# Altium PCB PCB1.pcbdoc
Units mil, origin at the board's own origin, x right, y up, seen from the top; angles counter-clockwise.
Board outline 4425 x 4500 mil, 2 copper layers (Top Layer, Bottom Layer); 64 components, 61 nets, 284 pads, 245 vias.
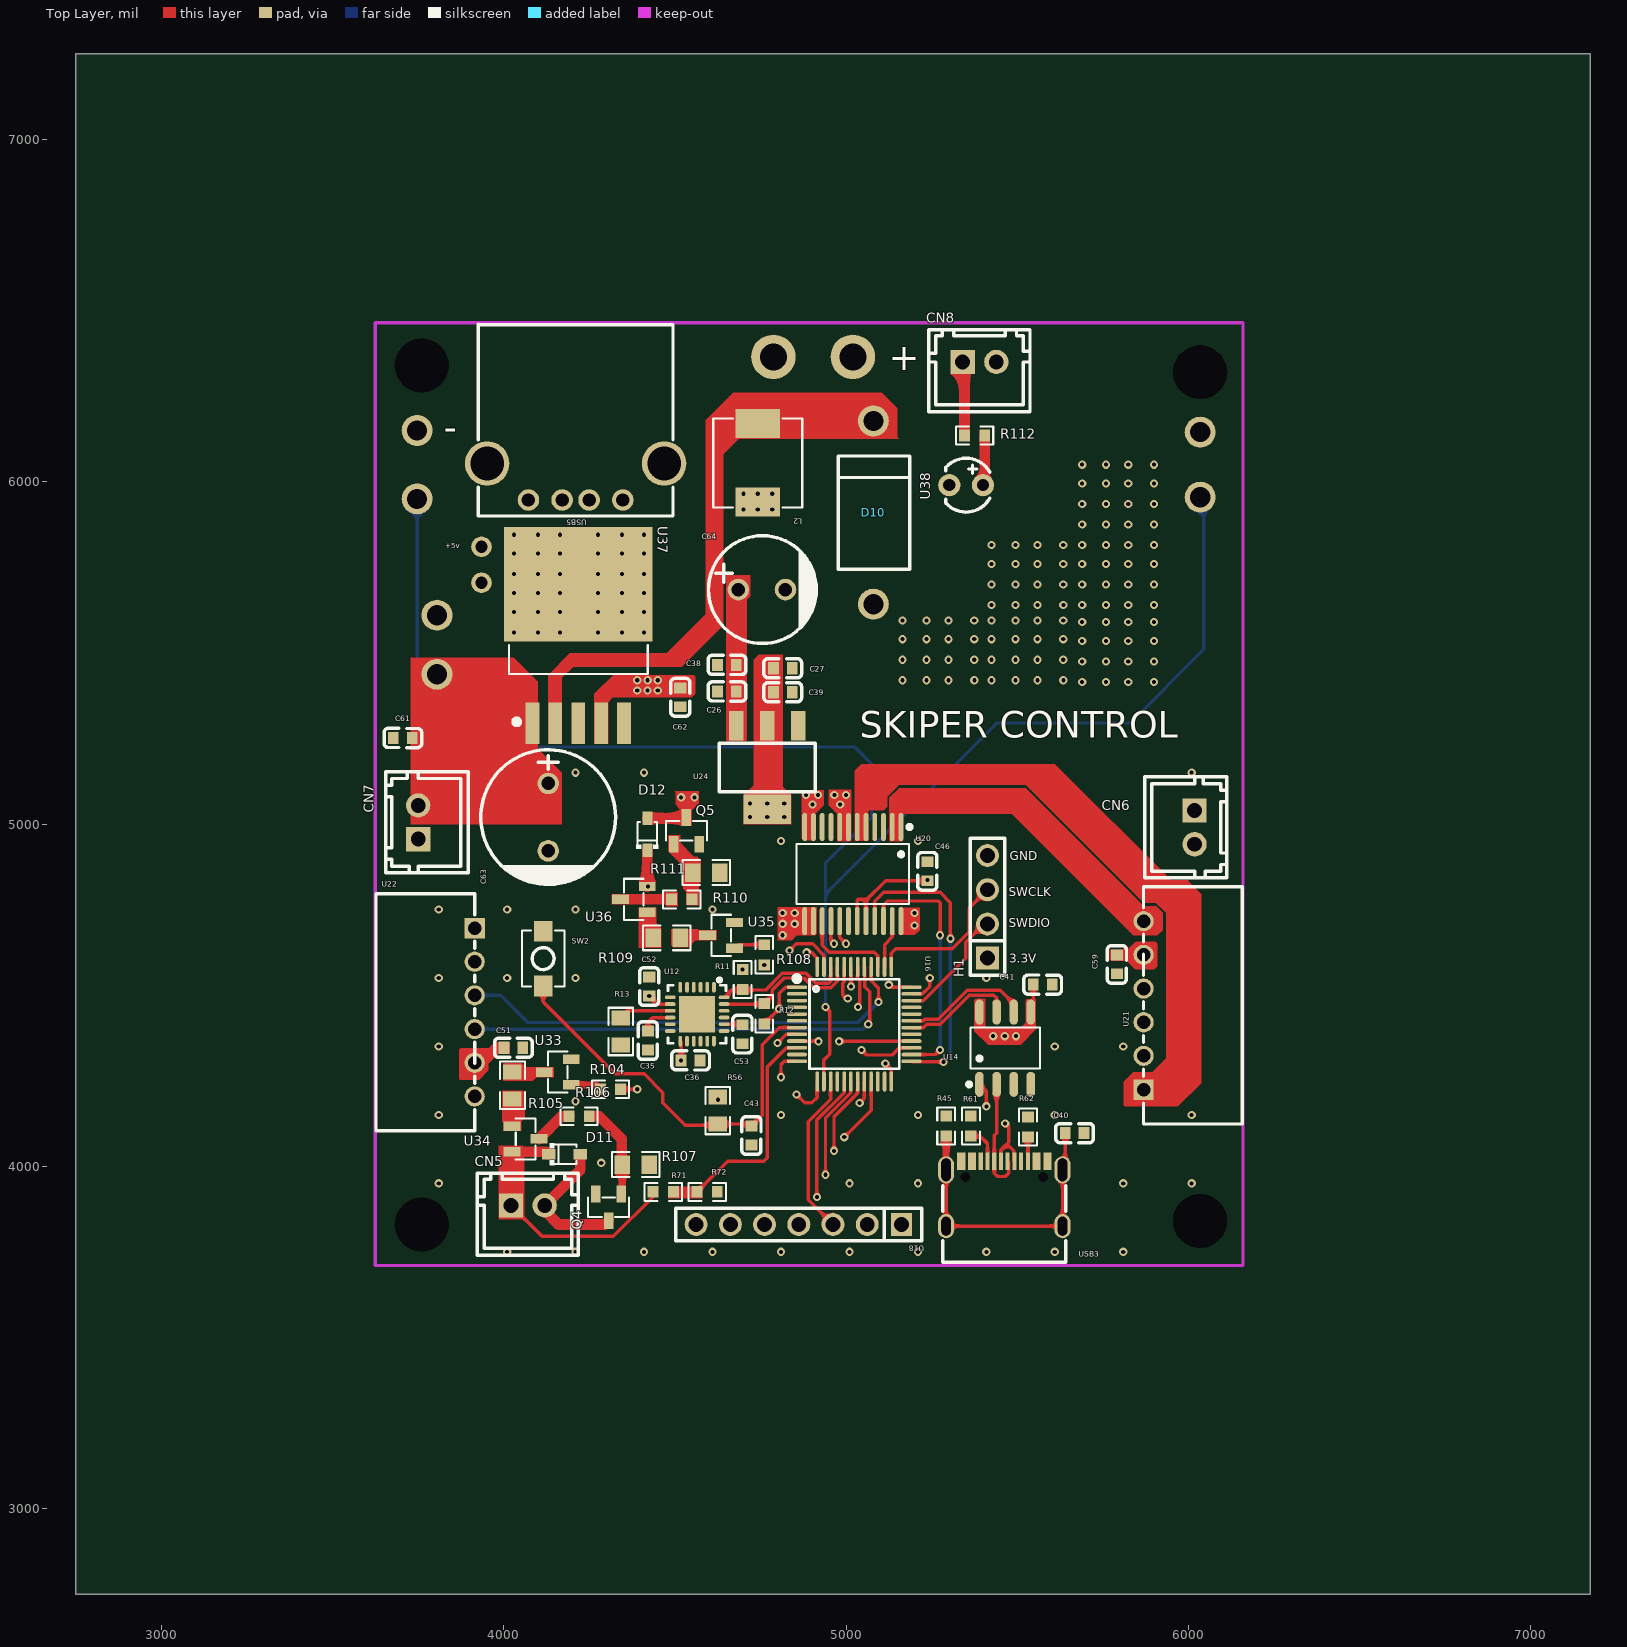
[diagram p0: Top Layer view]
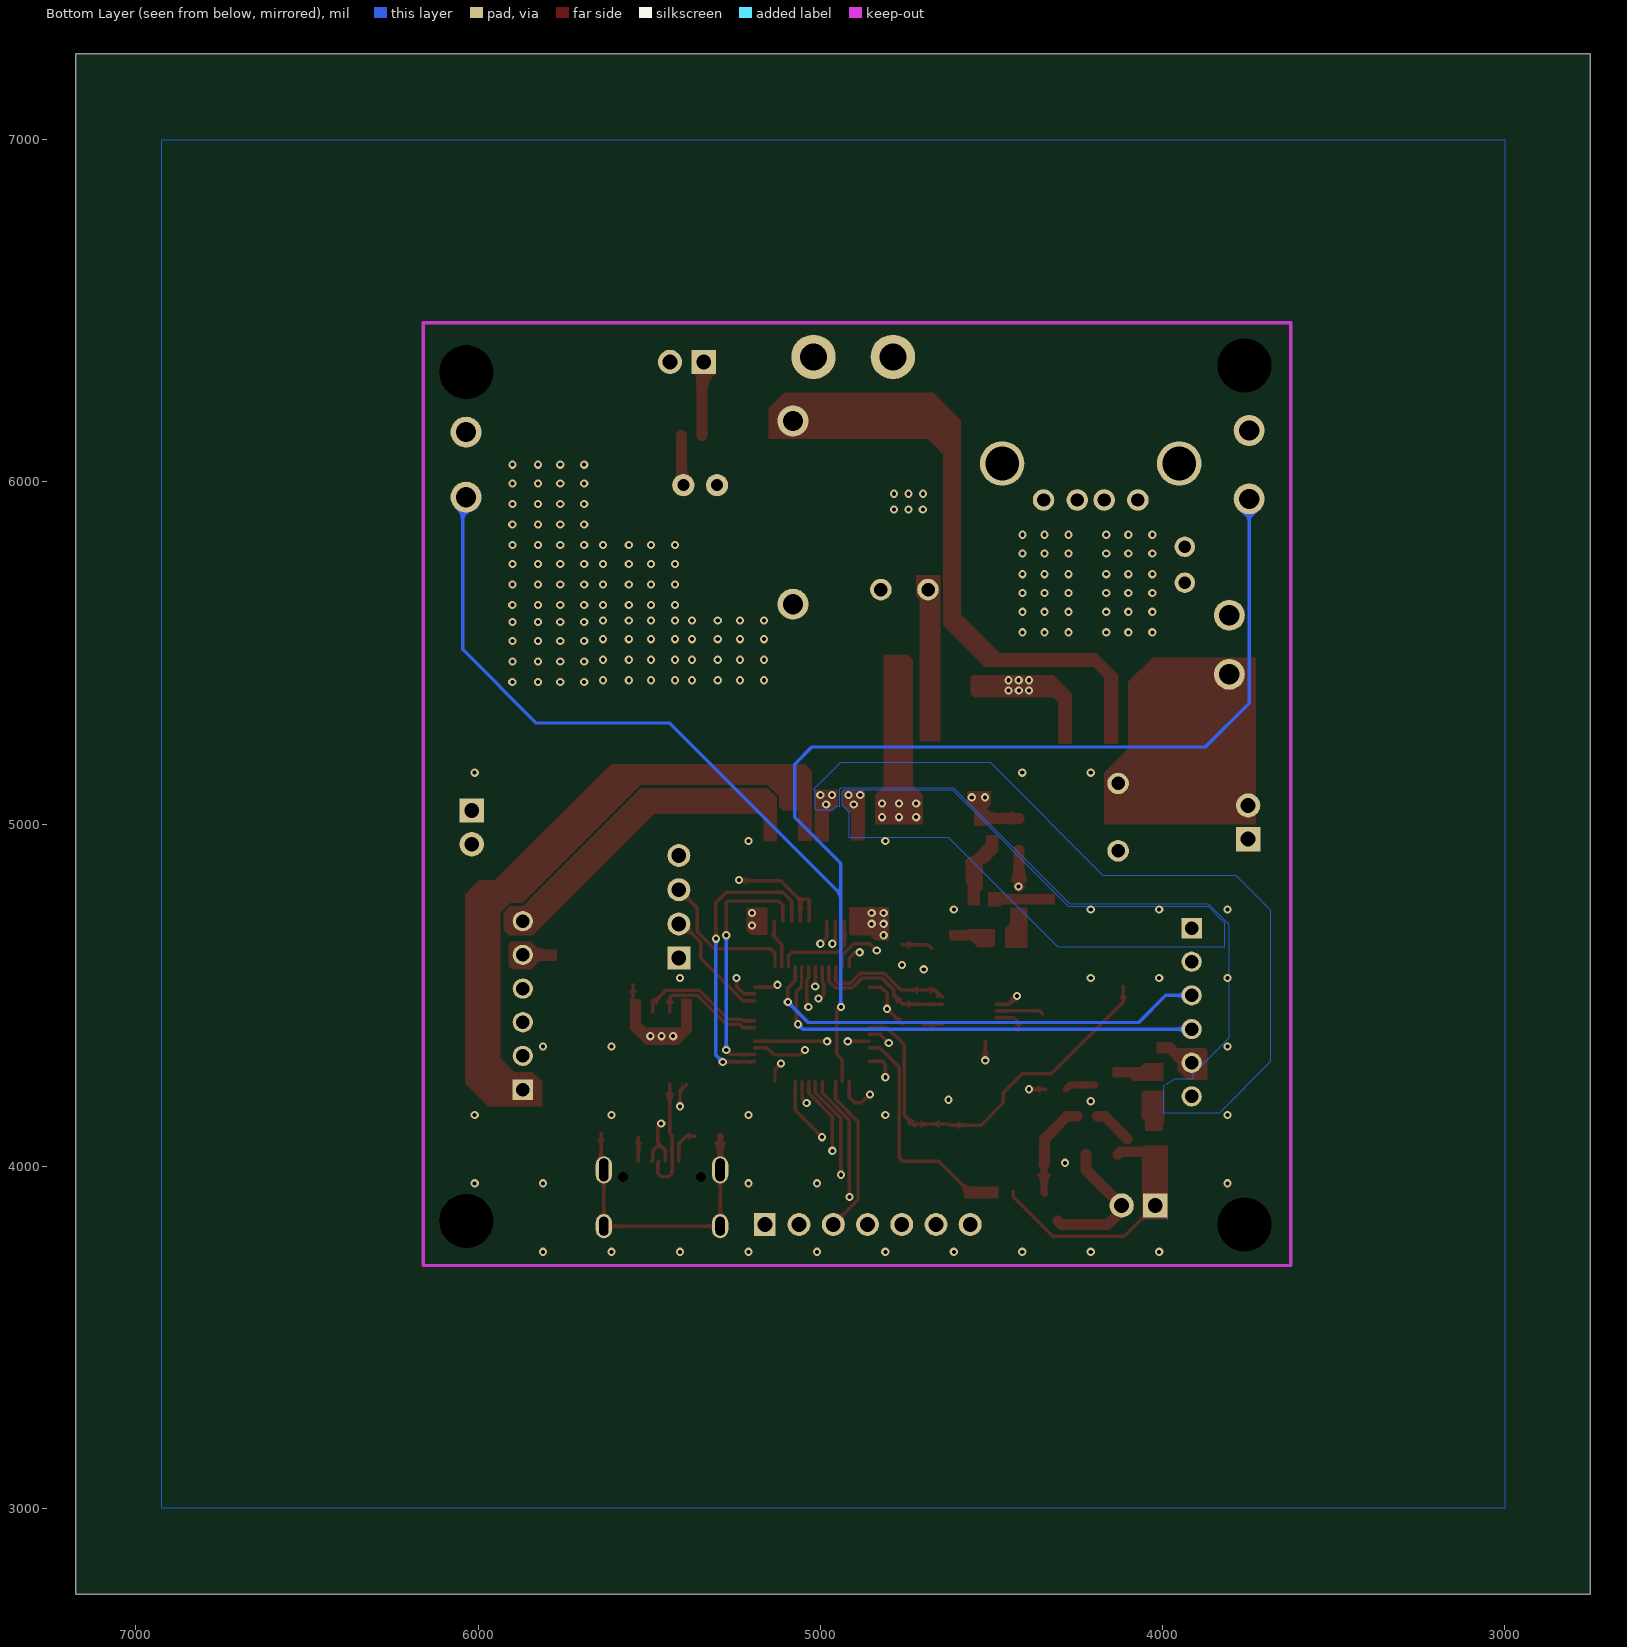
[diagram p1: Bottom Layer view, seen from below]

## Layer stack, top to bottom
Top Layer: signal copper (thickness not stored)
Dielectric: dielectric 12.6, FR-4, Dk 4.8
Bottom Layer: signal copper (thickness not stored)

## Board outline
7175,2750 2750,2750 2750,7250 7175,7250
cut-out: 6113.24,3840 ccw(c6034.5,3840) 5955.76,3840 ccw(c6034.5,3840)
cut-out: 3839.24,3830 ccw(c3760.5,3830) 3681.76,3830 ccw(c3760.5,3830)
cut-out: 3839.24,6340 ccw(c3760.5,6340) 3681.76,6340 ccw(c3760.5,6340)
cut-out: 6113.24,6320 ccw(c6034.5,6320) 5955.76,6320 ccw(c6034.5,6320)

## Components (designator, comment, footprint, x,y, rotation, side; value= is the part's Value field where it differs from the comment)
C26 "CL10A106KP8NNNC" C0603 4652.08,5387.32 r180 top
C27 "CL10A106KP8NNNC" C0603 4815.45,5455 r0 top
C35 "CC0603KRX7R9BB104" C0603 4420.93,4367.6 r90 top
C36 "CC0603KRX7R9BB104" C0603 4545.78,4309.43 r180 top
C38 "CC0603KRX7R9BB104" C0603 4652.08,5465 r180 top
C39 "CC0603KRX7R9BB104" C0603 4815.45,5385 r0 top
C40 "0603B104K500NT" C0603 5668.19,4096.61 r0 top
C41 "0603B104K500NT" C0603 5575,4530.62 r0 top
C43 "CC0603KRX7R9BB104" C0603 4723.78,4090 r90 top
C46 "0603B104K500NT" C0603 5237.72,4862.05 r90 top
C51 "0603B104K500NT" C0603 4027.95,4346.1 r180 top
C52 "CC0603KRX7R9BB103" C0603 4425,4525.13 r90 top
C53 "0603B222K500NT" C0603 4697.27,4385.59 r270 top
C59 "0603B104K500NT" C0603 5791.55,4590.07 r90 top
C61 "0603B104K500NT" C0603 3705,5251.41 r180 top
C62 "0603B104K500NT" C0603 4515.86,5370 r270 top
C63 "ERS1VM681G16OT" CAP-TH_BD10.0-P5.00-D0.6-FD 4130,5020 r270 top
C64 "01EC3470" CAP-TH_BD8.0-P3.50-D0.6-FD 4754.25,5685 r0 top
CN5 "ZX-XH2.54-2PZZ" CONN-TH_2P-P2.50_HX25003-2A 4070.44,3885.43 r0 top
CN6 "ZX-XH2.54-2PZZ" CONN-TH_2P-P2.50_HX25003-2A 6018.48,4990 r270 top
CN7 "ZX-XH2.54-2PZZ" CONN-TH_2P-P2.50_HX25003-2A 3750,5005 r90 top
CN8 "ZX-XH2.54-2PZZ" CONN-TH_2P-P2.50_HX25003-2A 5390,6350 r0 top
D10 "1N5824_C7503125" DO-27_BD5.3-L8.4-P12.40-D1.3-RD 5080,5910 r270 top
D11 "1N5819WS_C191023" SOD-323_L1.8-W1.3-LS2.5-RD 4177.37,4035 r0 top
D12 "1N5819WS_C191023" SOD-323_L1.8-W1.3-LS2.5-RD 4419.45,4970 r90 top
H1 "PZ254V-11-04P" HDR-TH_4P-P2.54-V-M 5413.47,4758.05 r90 top
L2 "SLO0630H220MTT" IND-SMD_L7.1-W6.6 4742.19,6055 r90 top
Q4 "2N7002_C916396" SOT-23-3_L2.9-W1.3-P1.90-LS2.4-BR 4306.31,3880 r90 top
Q5 "2N7002_C916396" SOT-23-3_L2.9-W1.3-P1.90-LS2.4-BR 4533.57,4980 r270 top
R11 "0603WAF4701T5E" R0603 4697.98,4545.73 r90 top
R12 "0603WAF4701T5E" R0603 4761,4445.82 r270 top
R13 "RT0805BRD0710KL" R0805 4341.53,4393.71 r90 top
R45 "0603WAF4701T5E" R0603 5292.6,4117.62 r270 top
R56 "RT0805BRD0710KL" R0805 4625.54,4162.81 r90 top
R61 "0603WAF4701T5E" R0603 5365,4117.62 r270 top
R62 "0603WAF4701T5E" R0603 5531.58,4114.66 r90 top
R71 "0603WAF4701T5E" R0603 4465.9,3925 r180 top
R72 "0603WAF1001T5E" R0603 4594.24,3925 r180 top
R104 "0603WAF1001T5E" R0603 4311.87,4224.98 r0 top
R105 "RT0805BRD0710KL" R0805 4025.39,4236.07 r270 top
R106 "0603WAF1001T5E" R0603 4220,4146.14 r180 top
R107 "RT0805BRD0710KL" R0805 4385.63,4004.98 r180 top
R108 "0603WAF1001T5E" R0603 4761,4617.72 r270 top
R109 "RT0805BRD0710KL" R0805 4476.36,4667.26 r180 top
R110 "0603WAF1001T5E" R0603 4520.18,4779.68 r180 top
R111 "RT0805BRD0710KL" R0805 4591.38,4858.06 r180 top
R112 "0603WAF1001T5E" R0603 5375.68,6135.31 r180 top
SW2 "TS342A2P-WZ" SW-SMD_L4.0-W2.9-LS5.0 4115,4606.68 r90 top
U12 "MPU-6050" QFN-24_L4.0-W4.0-P0.50-BL-EP2.7 4565.07,4444.25 r180 top
U14 "CH340N" SOP-8_L4.9-W3.9-P1.27-LS6.0-BL 5465,4345 r0 top
U16 "STM32F103C8T6" LQFP-48_L7.0-W7.0-P0.50-LS9.0-BL 5024.11,4415 r270 top
U18 "PM254-1-07-Z-8.5" HDR-TH_7P-P2.54-V-F 4862.1,3830 r180 top
U20 "TB6612FNG(O,C,8,EL" SSOP-24_L8.4-W5.8-P0.65-LS7.8-BL 5020,4853.67 r180 top
U21 "ZX-XH2.54-6PWZ" CONN-TH_6P-P2.50_ZX-XH2.54-6PWZ 5869.36,4470 r90 top
U22 "ZX-XH2.54-6PWZ" CONN-TH_6P-P2.50_ZX-XH2.54-6PWZ 3915,4450 r270 top
U24 "AMS1117-5.0_C347223" SOT-223_L6.7-W3.5-P2.30-BR 4770,5165.09 r90 top
U33 "SS8050_C7420370" SOT-23-3_L2.9-W1.3-P1.90-LS2.4-BR 4157.73,4275 r0 top
U34 "SS8550_C7420371" SOT-23-3_L2.9-W1.3-P1.90-LS2.4-BR 4063.58,4080 r180 top
U35 "SS8050_C7420370" SOT-23-3_L2.9-W1.3-P1.90-LS2.4-BR 4635.06,4674.77 r0 top
U36 "SS8550_C7420371" SOT-23-3_L2.9-W1.3-P1.90-LS2.4-BR 4380,4780 r0 top
U37 "LM2596S-5.0_C347421" TO-263-5_L10.2-W8.9-P1.70-BR 4217.75,5497.53 r270 top
U38 "204-10SDRD/S530-A3/F182-68" LED-TH_BD4.0-P2.50-RD 5351.03,5990 r0 top
USB3 "KH-TYPE-C-16P" USB-C-SMD_KH-TYPE-C-16P 5462.68,3920 r0 top
USB5 "USB-231-BRW" USB-A-TH_USB-231-ARY 4210,6000 r180 top

## Footprints (in the part's own frame and the unit in brackets; to place one, negate y for a bottom-side part, rotate by r counter-clockwise, add the part's x,y. Pads: shape width x height; smd on the part's side, far side on the other; paste and mask are expansions set on the pad)
C0603 [mm]
  rect 0.8x0.9 smd: 1(-0.7,0) 2(0.7,0)
  silkscreen extent -1.41,-0.71 1.39,0.72
CAP-TH_BD8.0-P3.50-D0.6-FD [mm]
  round 1.6 hole 1: 1(-1.75,0) 2(1.75,0)
  silkscreen extent -3.96,-4 4.04,4
CAP-TH_BD10.0-P5.00-D0.6-FD [mm]
  round 1.6 hole 1: 1(-2.5,0) 2(2.5,0)
  silkscreen extent -5,-5 5.08,5
CONN-TH_2P-P2.50_HX25003-2A [mm]
  rect 1.8x1.8 hole 1.1: 1(-1.25,0)
  round 1.8 hole 1.1: 2(1.25,0)
  silkscreen extent -3.75,-3.7 3.75,2.41
CONN-TH_6P-P2.50_ZX-XH2.54-6PWZ [mm]
  rect 1.524x1.5 hole 1: 1(-6.25,0)
  round 1.5 hole 1: 2(-3.75,0) 3(-1.25,0) 4(1.25,0) 5(3.75,0) 6(6.25,0)
  silkscreen extent -8.8,-7.32 8.8,0
DO-27_BD5.3-L8.4-P12.40-D1.3-RD [mm]
  round 2.3 hole 1.5: 1(-6.8,0) 2(6.8,0)
  silkscreen extent -4.2,-2.6 4.2,2.7
HDR-TH_4P-P2.54-V-M [mm]
  rect 1.7x1.7 hole 1.1: 1(-3.81,0)
  round 1.7 hole 1.1: 2(-1.27,0) 3(1.27,0) 4(3.81,0)
  silkscreen extent -5.08,-1.27 5.08,1.27
HDR-TH_7P-P2.54-V-F [mm]
  rect 1.575x1.7 hole 1.1: 1(-7.62,0)
  round 1.7 hole 1.1: 2(-5.08,0) 3(-2.54,0) 4(0,0) 5(2.54,0) 6(5.08,0) 7(7.62,0)
  silkscreen extent -9.13,-1.2 9.13,1.2
IND-SMD_L7.1-W6.6 [mm]
  rect 2.15x3.32 smd: 1(-2.913,0) 2(2.913,0)
  silkscreen extent -3.3,-3.3 3.3,3.3
LED-TH_BD4.0-P2.50-RD [mil]
  round 65 hole 35.43: 1(-49.21,0) 2(49.2,0)
  silkscreen extent -59,-79 69,79
LQFP-48_L7.0-W7.0-P0.50-LS9.0-BL [mm]
  oval 0.27x1.5 smd: 1(-2.75,-4.25) 2(-2.25,-4.25) 3(-1.75,-4.25) 4(-1.25,-4.25) 5(-0.75,-4.25) 6(-0.25,-4.25) 7(0.25,-4.25) 8(0.75,-4.25) 9(1.25,-4.25) 10(1.75,-4.25) 11(2.25,-4.25) 12(2.75,-4.25) 25(2.75,4.25) 26(2.25,4.25) 27(1.75,4.25) 28(1.25,4.25) 29(0.75,4.25) 30(0.25,4.25) 31(-0.25,4.25) 32(-0.75,4.25) 33(-1.25,4.25) 34(-1.75,4.25) 35(-2.25,4.25) 36(-2.75,4.25)
  oval 1.5x0.27 smd: 13(4.25,-2.75) 14(4.25,-2.25) 15(4.25,-1.75) 16(4.25,-1.25) 17(4.25,-0.75) 18(4.25,-0.25) 19(4.25,0.25) 20(4.25,0.75) 21(4.25,1.25) 22(4.25,1.75) 23(4.25,2.25) 24(4.25,2.75) 37(-4.25,2.75) 38(-4.25,2.25) 39(-4.25,1.75) 40(-4.25,1.25) 41(-4.25,0.75) 42(-4.25,0.25) 43(-4.25,-0.25) 44(-4.25,-0.75) 45(-4.25,-1.25) 46(-4.25,-1.75) 47(-4.25,-2.25) 48(-4.25,-2.75)
  silkscreen extent -3.59,-4.46 3.3,3.34
QFN-24_L4.0-W4.0-P0.50-BL-EP2.7 [mm]
  oval 0.28x0.8 smd: 1(-1.25,-2) 2(-0.75,-2) 3(-0.25,-2) 4(0.25,-2) 5(0.75,-2) 6(1.25,-2) 13(1.25,2) 14(0.75,2) 15(0.25,2) 16(-0.25,2) 17(-0.75,2) 18(-1.242,2)
  oval 0.8x0.28 smd: 7(2,-1.25) 8(2,-0.75) 9(2,-0.25) 10(2,0.25) 11(2,0.75) 12(2,1.25) 19(-2,1.25) 20(-2,0.75) 21(-2,0.25) 22(-2,-0.25) 23(-2,-0.75) 24(-2,-1.25)
  rect 2.7x2.7 smd: 25(0.012,0)
  silkscreen extent -2.14,-2.79 2.16,2.15
R0603 [mil]
  rect 31.75x34.02 smd: 1(-29.66,0) 2(29.66,0)
  silkscreen extent -55,-26 55,26
R0805 [mm]
  rect 1.133x1.377 smd: 1(-1,0) 2(1,0)
  silkscreen extent -1.76,-0.92 1.76,0.92
SOD-323_L1.8-W1.3-LS2.5-RD [mm]
  rect 1x0.75 smd: 1(-1.173,0) 2(1.173,0)
  silkscreen extent -1.08,-0.8 0.9,0.8
SOP-8_L4.9-W3.9-P1.27-LS6.0-BL [mm]
  oval 0.63x1.865 smd: 1(-1.905,-2.682) 2(-0.635,-2.682) 3(0.635,-2.682) 4(1.905,-2.682) 5(1.905,2.682) 6(0.635,2.682) 7(-0.635,2.682) 8(-1.905,2.682)
  silkscreen extent -2.82,-2.83 2.58,1.52
SOT-23-3_L2.9-W1.3-P1.90-LS2.4-BR [mm]
  rect 1.25x0.7 smd: 1(1,-0.95) 2(1,0.95) 3(-1,0)
  silkscreen extent -0.73,-1.53 0.73,1.53
SOT-223_L6.7-W3.5-P2.30-BR [mm]
  rect 2.2x1.1 smd: 1(3.099,-2.3) 2(3.099,0) 3(3.099,2.3)
  rect 2.2x3.5 smd: 4(-3.099,0)
  silkscreen extent -1.8,-3.55 1.8,3.55
SSOP-24_L8.4-W5.8-P0.65-LS7.8-BL [mil]
  oval 14.33x81.97 smd: 1(-140.75,-137.44) 2(-115.16,-137.44) 3(-89.57,-137.44) 4(-63.98,-137.44) 5(-38.39,-137.44) 6(-12.79,-137.44) 7(12.8,-137.44) 8(38.39,-137.44) 9(63.98,-137.44) 10(89.57,-137.44) 11(115.16,-137.44) 12(140.75,-137.44) 13(140.75,137.44) 14(115.16,137.44) 15(89.57,137.44) 16(63.98,137.44) 17(38.39,137.44) 18(12.8,137.44) 19(-12.79,137.44) 20(-38.39,137.44) 21(-63.98,137.44) 22(-89.57,137.44) 23(-115.16,137.44) 24(-140.75,137.44)
  silkscreen extent -172,-143 164,87
SW-SMD_L4.0-W2.9-LS5.0 [mm]
  rect 1.53x1.36 smd: 1(-2.035,0) 2(2.035,0)
  silkscreen extent -2.08,-1.58 2.08,1.58
TO-263-5_L10.2-W8.9-P1.70-BR [mm]
  rect 3.083x1.02 smd: 1(5.16,-3.4) 2(5.16,-1.7) 3(5.16,0) 4(5.16,1.7) 5(5.16,3.4)
  rect 8.5x11 smd: 6(-5.16,0)
  silkscreen extent -0.66,-5.16 5.26,5.16
USB-A-TH_USB-231-ARY [mm]
  round 1.6 hole 1: 1(-3.5,1.355) 2(-1,1.355) 3(1,1.355) 4(3.5,1.355)
  round 3.3 hole 2.5: 5(-6.57,-1.355) 6(6.57,-1.355)
  silkscreen extent -7.23,-11.68 7.24,2.54
USB-C-SMD_KH-TYPE-C-16P [mm]
  oval 1.2x2 hole 0.7 slot 1.7 at 90 deg: 1(-4.32,1.765) 2(4.32,1.765)
  oval 1.2x1.8 hole 0.7 slot 1.4 at 90 deg: 3(-4.32,-2.415) 4(4.32,-2.415)
  rect 0.3x1.3 smd: A1(-3.35,2.415) A4(-2.55,2.415) A5(-1.25,2.415) A6(-0.25,2.415) A7(0.25,2.415) A8(1.25,2.415) A9(2.55,2.415) A12(3.35,2.415) B1(3.05,2.415) B4(2.25,2.415) B5(1.75,2.415) B6(0.75,2.415) B7(-0.75,2.415) B8(-1.75,2.415) B9(-2.25,2.415) B12(-3.05,2.415)
  Multi-Layer board cut-out: -2.54,1.235 -2.575,1.387 -2.672,1.509 -2.812,1.576 -2.968,1.576 -3.108,1.509 -3.205,1.387 -3.24,1.235 -3.24,1.235 -3.205,1.083 -3.108,0.961 -2.968,0.894 -2.812,0.894 -2.672,0.961 -2.575,1.083 -2.54,1.235
  Multi-Layer board cut-out: 3.24,1.235 3.205,1.387 3.108,1.509 2.968,1.576 2.812,1.576 2.672,1.509 2.575,1.387 2.54,1.235 2.54,1.235 2.575,1.083 2.672,0.961 2.812,0.894 2.968,0.894 3.108,0.961 3.205,1.083 3.24,1.235
  silkscreen extent -4.57,-5.08 4.57,0.57

## Free pads (board coordinates)
  round 60 hole 36: 1(3935,5810) 2(3935,5705)
  round 90.55 hole 59.06: 7(6035,5955) 8(6035,6145) 9(3746.93,5950) 9(3805,5437.44) 9(3805,5610) 10(3746.93,6150)
  round 129.92 hole 78.74: 9(4787.89,6365) 9(5020,6365)

## Via types
v1: diameter 24.02, hole 12.01, Top Layer to Bottom Layer, 208 vias
v2: diameter 24.02, hole 11.97, Top Layer to Bottom Layer, 37 vias

## Nets (pads, with @x,y where several pads share a name; then routed paths per layer and width w, separated by ;. In a path a pad name is that pad's centre, name@x,y a point inside that pad or via, vN(x,y) a via of type N, cw(c..) or ccw(c..) an arc to the next point about the centre after c; other vN are vias at no path point)
3.3V: C27.1 C36.2 C39.1 C41.1 C46.1 C51.2 C52.1 C59.2 H1.1 R11.2 R12.2 R56.2 U12.8 U12.13 U14.5 U14.8 U16.1 U16.9 U16.24 U16.36 U16.48 U18.2 U20.19 U20.20 U21.5 U22.5 U24.2 U24.4 | length 994.1
  Top Layer w10: v1(4425,4497.57) 4448.79,4473.78 U12.8 ; U12.13 4518.22,4363.15 v1(4518.22,4309.43) ; R12.2 4804.84,4460 v1(4805,4460) 4805,4505 4823.27,4523.27 U16.1 ; U16.9 4919.21,4365.79 v1(4920,4365) ; v1(4885,4625) 4899.14,4625 4915.84,4608.3 U16.48 ; U20.19 5032.79,4777.79 5035,4780 5055,4780 5058.39,4776.61 ; U20.20 5058.39,4776.61 ; v1(5115,4300) 5132.38,4282.62 U16.24 ; v1(5125,4530) 5131.73,4523.27 U16.36 ; C46.1 5116.27,4834.49 5058.39,4776.61 ; U14.5 5547.44,4458.05 C41.1
  Bottom Layer w10: v1@4880,4620 v1(4885,4625)
  other v1: 4625.54,4194.31 5430,4380 5463.7,4380 5496.77,4380 4697.98,4575.39 5237.72,4836.46 4720,5020 4770,5020 4819.61,5020 4720,5060 4770,5060 4819.61,5060
$1N2316: C35.2 U12.10 | length 96.6
  Top Layer w10: C35.2 4420.93,4420.71 4434.63,4434.41 U12.10
$1N2321: C53.1 U12.20 | length 54.1
  Top Layer w10: U12.20 4695.7,4414.72 C53.1
$1N2324: R13.2 U12.9 | length 139.9
  Top Layer w10: R13.2@4350.27,4444.84 4359.52,4454.09 U12.9
$1N3664: C40.1 R45.2 USB3.1 USB3.2 USB3.3 USB3.4 | length 878.1
  Top Layer w10: USB3.1 USB3.3 USB3.4 USB3.2 5640.63,3997.36 C40.1
  Top Layer w20: USB3.1 R45.2
$1N3668: R61.2 USB3.A5 | length 108.8
  Top Layer w10: R61.2 5392.04,4087.96 5413.47,4066.53 USB3.A5
$1N3669: R62.1 USB3.B5 | length 69.9
  Top Layer w10: USB3.B5 R62.1
$1N37891: R104.1 U33.1 | length 90.3
  Top Layer w19.68: U33.1 4269.58,4237.6 R104.1
$1N37935: R105.1 U33.3
$1N37939: R105.2 U34.1
$1N37979: R106.2 U34.3 | length 114.8
  Top Layer w31.5: U34.3 4169.09,4146.14 R106.2
$1N38083: Q4.1 R106.1 R107.2 | length 284.9
  Top Layer w19.68: Q4.1 4346.26,3921.92 R107.2
  Top Layer w31.5: R106.1 4278.86,4146.14 4345,4080 4345,4006.24 R107.2
$1N38443: R108.1 U35.1 | length 90.7
  Top Layer w10: U35.1 4684.44,4647.38 R108.1
$1N38448: R109.1 U35.3
$1N38450: R109.2 U36.1
$1N38452: R110.2 U36.3
$1N38463: Q5.1 R110.1 R111.2
$1N51871: D10.1 L2.2 U37.2
$1N54096: R112.1 U38.2 | length 147.4
  Top Layer w31.5: U38.2 5405.34,5995.1 R112.1
$1N58015: CN5.2 D11.2 Q4.3 | length 415.5
  Top Layer w31.5: D11.2 4223.54,3989.32 CN5.2 4119.65,3870.35 4160,3830 4295.68,3830 Q4.3
$1N58022: CN6.2 CN7.1 D12.2 Q5.3 | length 115.4
  Top Layer w31.5: D12.2 4530.36,5016.16 Q5.3
  other v1: 4518.46,5077.94 4557.7,5077.94
+5V: C26.1 C38.1 C62.1 C64.1 L2.1 pad.1 U24.3 U37.4 USB5.1
  other v1: 4390,5390 4420,5390 4450,5390 4390,5420.18 4420.49,5420.18 4449.9,5420.18 4700.5,5918.64 4742.19,5918.64 4784.55,5918.64 4700,5965 4742.19,5965 4784.55,5965
A_M1: U20.5 U20.6 U21.1
A_M2: U20.1 U20.2 U21.6
ADC1: R71.1 R72.2 U16.10 | length 621.9
  Top Layer w10: R72.2 4654.58,4015 4760,4015 4770,4025 4770,4290 4826.1,4346.1 U16.10
AIN1: U16.25 U20.21 | length 869.5
  Top Layer w10: U20.21 5083.98,4773.98 5110,4800 5275,4800 5305,4770 v1(5305,4665) ; U16.25 5193.16,4305 v1(5285,4305)
  Bottom Layer w10: v1(5285,4305) 5305,4325 v1(5305,4665)
AIN2: U16.26 U20.22 | length 738
  Top Layer w10: U20.22 5109.57,4762.22 5122.35,4775 5270,4775 5275,4770 v1(5275,4675) ; U16.26 5261.42,4326.42 v1(5275,4340)
  Bottom Layer w10: v1(5275,4340) v1(5275,4675)
B_M1: U20.11 U20.12 U22.1
  other v1: 4902.5,5057.26 4883.21,5085 4918.04,5085
B_M2: U20.7 U20.8 U22.6
  other v1: 4982.92,5057.26 4965.95,5085 4999.93,5085
BIN1: U16.27 U20.17 | length 580.4
  Top Layer w10: U20.17 4981.61,4668.39 v1(5000,4650) ; v1(5045,4340) 5060,4325 5135,4325 5156.1,4346.1 U16.27
  Inner1 w10: v1(5000,4650) 4980,4630 4980,4425 5010,4395 5010,4375 v1(5045,4340)
BIN2: U16.28 U20.16 | length 572.9
  Top Layer w10: U20.16 4956.02,4658.98 v1(4965,4650) ; v1(4980,4365) 5156.12,4365 5156.91,4365.79 U16.28
  Inner1 w10: v1(4965,4650) 4965,4380 v1(4980,4365)
D+: U14.1 USB3.A6 USB3.B6 | length 334.9
  Top Layer w10: U14.1 5410,4219.39 v1(5410,4175) ; USB3.A6 5452.84,4047.84 5462.93,4057.93 ; v1(5465,4125) 5475,4115 5475,4070 5462.93,4057.93 ; USB3.B6 5490,4017.29 5490,4045 5477.07,4057.93 5462.93,4057.93
  Inner1 w10: v1(5410,4175) 5460,4125 v1(5465,4125)
D-: U14.2 USB3.A7 USB3.B7 | length 348.7
  Top Layer w10: U14.2 5440,4096.88 5433.15,4090.02 USB3.B7 5433.15,3980 5443.15,3970 5465,3970 5475.3,3980.3 5475.3,4012.3 USB3.A7
ENCODER1_A: U16.42 U21.3 | length 974.6
  Top Layer w10: U16.42 5033.95,4551.05 5040,4545 5040,4470 v1(5035,4465)
  Inner1 w10: v1(5035,4465) 5055,4445 5845.14,4445 U21.3
ENCODER1_B: U16.43 U21.4 | length 927.8
  Top Layer w10: U16.43 5014.27,4550.96 5015,4550.23 v1(5015,4525)
  Inner1 w10: v1(5015,4525) 5036.99,4503.01 5853.15,4503.01 U21.4
ENCODER2_A: U16.40 U22.3 | length 1349
  Top Layer w10: U16.40 5073.32,4542.01 5095,4520.33 v1(5095,4480)
  Bottom Layer w10: U22.3 3990.78,4499.22 4070,4420 5035,4420 v1(5095,4480)
ENCODER2_B: U16.41 U22.4 | length 1332.1
  Top Layer w10: U16.41 5055,4580.96 5055,4525 5070,4510 5070,4420 v1(5065,4415)
  Bottom Layer w10: U22.4 5050.79,4400.79 v1(5065,4415)
GND: C26.2 C27.2 C35.1 C36.1 C38.2 C39.2 C40.2 C41.2 C43.1 C46.2 C51.1 C52.2 C53.2 C59.1 C61.2 C62.2 C63.2 C64.2 CN8.2 D10.2 H1.4 pad.2 pad.8 pad.9@4787.89,6365 pad.10 Q4.2 Q5.2 R13.1 R45.1 R61.1 R62.2 R72.1 R107.1 R111.1 SW2.2 U12.18 U14.3 U16.8 U16.20 U16.23 U16.35 U16.44 U16.47 U18.1 U20.3 U20.4 U20.9 U20.10 U20.18 U21.2 U22.2 U24.1 U33.2 U35.2 U37.3 U37.5 U37.6 U38.1 USB3.A1 USB3.A12 USB3.B1 USB3.B12 USB5.4 USB5.5 USB5.6 | length 488.6
  Top Layer w10: v1(4800,4360) 4825.47,4385.47 U16.8 ; v1(4835,4630) 4855,4650 4902.38,4650 4935.53,4616.85 U16.47 ; U16.44 4994.58,4539.58 4990,4535 4990,4500 5000,4490 v1(5005,4490) ; v1(5040,4185) 5053.64,4198.64 U16.20 ; U16.35 5223.58,4503.58 5245,4525 v1(5245,4550)
  Bottom Layer w10: v1@4835,4625 v1(4835,4630)
  other v1: 4285,4010 5690,5415 5760,5415 5824.59,5415 5900,5415 5165,5420 5235,5420 5299.59,5420 5375,5420 5425,5420 5495,5420 5559.59,5420 5635,5420 5690,5475 5760,5475 5824.59,5475 5899.7,5475 5165,5480 5235,5480 5299.59,5480 5374.7,5480 5425,5480 5495,5480 5559.59,5480 5634.7,5480 5690,5535 5760,5535 5824.59,5535 5899.7,5535 5165,5540 5235,5540 5299.59,5540 5374.7,5540 5425,5540 5495,5540 5559.59,5540 5634.7,5540 4030,5560 4100,5560 4164.59,5560 4275,5560 4345,5560 4409.59,5560 5690,5590 5760,5590 5824.59,5590 5899.7,5590 5165,5595 5235,5595 5299.59,5595 5374.7,5595 5425,5595 5495,5595 5559.59,5595 5634.7,5595 4030,5620 4100,5620 4164.59,5620 4275,5620 4345,5620 4409.59,5620 5425,5640 5495,5640 5559.59,5640 5635,5640 5690,5640 5760,5640 5824.59,5640 5900,5640 4030,5675 4100,5675 4164.59,5675 4275,5675 4345,5675 4409.59,5675 5425,5700 5495,5700 5559.59,5700 5634.7,5700 5690,5700 5760,5700 5824.59,5700 5899.7,5700 4030,5730 4100,5730 4164.59,5730 4275,5730 4345,5730 4409.59,5730 5425,5760 5495,5760 5559.59,5760 5634.7,5760 5690,5760 5760,5760 5824.59,5760 5899.7,5760 4030,5790 4100,5790 4164.59,5790 4275,5790 4345,5790 4409.59,5790 5425,5815 5495,5815 5559.59,5815 5634.7,5815 5690,5815 5760,5815 5824.59,5815 5899.7,5815 4030,5845 4100,5845 4164.59,5845 4275,5845 4345,5845 4409.59,5845 5690,5875 5760,5875 5824.59,5875 5900,5875 5690,5935 5760,5935 5824.59,5935 5899.7,5935 5690,5995 5760,5995 5824.59,5995 5899.7,5995 5690,6050 5760,6050 5824.59,6050 5899.7,6050
  other v2: 4010,3750 4210,3750 4410,3750 4610,3750 4810,3750 5010,3750 5210,3750 5410,3750 5610,3750 5810,3750 3810,3950 5010,3950 5210,3950 5810,3950 6010,3950 3810,4150 4810,4150 5210,4150 5610,4150 6010,4150 4210,4190 3810,4350 5610,4350 5810,4350 3810,4550 4010,4550 4210,4550 5410,4550 3810,4750 4010,4750 4210,4750 4610,4750 4810,4950 5210,4950 4210,5150 4410,5150 6010,5150
GROUND: pad.7 pad.9@3746.93,5950 U16.14 | length 4844.3
  Top Layer w10: U16.14 4935.53,4310.53 4952.23,4327.23 4952.23,4452.77 v1(4940,4465)
  Bottom Layer w10: pad.9@3746.93,5950 3746.93,5353.07 3875,5225 5025,5225 5075,5175 5075,5020 4940,4885 4940,4795 ; v1(4940,4465) 4940,4795 ; pad.7 6045,5945 6045,5510 5830,5295 5440,5295 4940,4795
I2C1_SCL: R12.1 U12.23 U16.45 | length 434.1
  Top Layer w10: U12.23 4759.3,4473.78 R12.1 4785,4499.48 4785,4515 4820,4550 4877.35,4550 4906.36,4520.98 4955.98,4520.98 4975,4540 4975,4582.22 U16.45
I2C1_SDA: R11.1 U12.24 U16.46 | length 397
  Top Layer w10: U12.24 4665.35,4515 4765,4515 4814.02,4564.02 4883.15,4564.02 4912.17,4535 4950.18,4535 4955.21,4540.03 U16.46
OSC_IN: U16.5
OSC_OUT: U16.6
POWER: U16.32
PWMA: U16.38 U20.23 | length 143.2
  Top Layer w10: U16.38 5112.69,4647.69 5135,4670 5135,4716.07 U20.23
PWMB: U16.39 U20.15 | length 279.2
  Top Layer w10: U20.15 4930,4715.8 4930,4645.58 4950.58,4625 5083.01,4625 5093.01,4615 U16.39
RST: C43.2 R56.1 SW2.1 U16.7 | length 1198.6
  Top Layer w10: SW2.1 4115,4480 4325,4270 4410,4270 4465,4215 4465,4185.36 4530.36,4120 4622.1,4120 R56.1 4717.9,4123.44 C43.2 4755,4148.78 4755,4355 4805.16,4405.16 U16.7
SAO: R108.2 U16.13 | length 541.6
  Top Layer w10: v1(4855,4210) 4880,4185 4900,4185 4915.84,4200.84 U16.13
  Inner1 w10: v1(4761,4588.06) 4855,4494.06 v1(4855,4210)
SPI1_CS: U16.21 U18.7 | length 733.6
  Top Layer w10: v1(4995,4085) 5073.32,4163.32 U16.21
  Inner1 w10: U18.7 4672.1,3940 4827.46,3940 4972.46,4085 v1(4995,4085)
SPI1_DC: U16.19 U18.6 | length 631.7
  Top Layer w10: v1(4965,4045) 4965,4145 5033.95,4213.95 U16.19
  Inner1 w10: U18.6 4662.1,3832.1 4750,3920 4852.46,3920 4965,4032.54 v1(4965,4045)
SPI1_MOSI: U16.17 U18.4 | length 472.6
  Top Layer w10: v1(4915,3910) 4915,4135.18 4994.58,4214.76 U16.17
  Inner1 w10: U18.4 4862.1,3842.96 4915,3895.86 v1(4915,3910)
SPI1_RES: U16.18 U18.5 | length 541.4
  Top Layer w10: v1(4940,3975) 4940,4140 5014.27,4214.27 U16.18
  Inner1 w10: U18.5 4790.86,3830 4935.86,3975 v1(4940,3975)
SPI1_SCK: U16.15 U18.3 | length 474.6
  Top Layer w10: U16.15 4955.21,4195.21 4890,4130 4890,3902.1 U18.3
SW: C61.1 C63.1 CN5.1 CN6.1 CN7.2 D11.1 D12.1 pad.9@3805,5437.44 R71.2 U20.13 U20.14 U20.24 U34.2 U36.2 U37.1 | length 731.2
  Top Layer w10: CN5.1 4111.66,3795 4320.38,3795 4436.23,3910.86 R71.2
  Top Layer w31.5: U34.2 4123.61,4042.6 D11.1 ; U36.2 4419.45,4817.48 D12.1
  other v1: 4815,4674.92 5200,4703.75 4815,4708.3 4850,4708.3 4815,4740 4850,4740 5200,4740 4421.34,4817.4
SWCLK: H1.3 U16.37 | length 438.8
  Top Layer w10: U16.37 5132.38,4622.38 5145,4635 5310,4635 5360,4685 5360,4754.58 H1.3
SWDIO: H1.2 U16.34 | length 342.4
  Top Layer w10: U16.34 5225.96,4483.9 5350,4607.94 5350,4655 5403.05,4708.05 H1.2
USART1_RX: U14.6 U16.31 | length 376.5
  Top Layer w10: U16.31 5224.76,4424.84 5225.29,4424.31 5229.99,4429.02 5269.02,4429.02 5354.02,4514.02 5450.98,4514.02 5490,4475 U14.6
USART1_TX: U14.7 U16.30 | length 332.8
  Top Layer w10: U16.30 5225.96,4405.16 5235.8,4415 5275,4415 5360.06,4500.06 5432.26,4500.06 5440,4492.32 U14.7
VBAT: CN8.1 pad.9@3805,5610 pad.9@5020,6365 R112.2 | length 216.9
  Top Layer w31.5: CN8.1 5346.02,6344.77 R112.2
XI: R104.2 U16.12 | length 571
  Top Layer w10: R104.2 v1(4390,4224.98) ; v1(4810,4260) 4810,4297.36 4819.37,4306.73 U16.12@4856.73,4306.73
  Inner1 w10: v1(4390,4224.98) 4774.98,4224.98 v1(4810,4260)
"": U12.1 U12.2 U12.3 U12.4 U12.5 U12.6 U12.7 U12.11 U12.12 U12.14 U12.15 U12.16 U12.17 U12.19 U12.21 U12.22 U12.25 U14.4 U16.2 U16.3 U16.4 U16.11 U16.16 U16.22 U16.29 U16.33 USB3.A4 USB3.A8 USB3.A9 USB3.B4 USB3.B8 USB3.B9 USB5.2 USB5.3

## Polygon pours and split planes (outlines as drawn)
GND on Top Layer (solid, remove dead copper, pour order 3): 3375,3395 6625,3395 6625,6715 3375,6715
GND on Bottom Layer (solid, remove dead copper, pour order 4): 3000,3000 6925,3000 6925,7000 3000,7000
SW on Inner1 (solid, remove dead copper, pour order 0): 4508.29,5217.64 4562.5,5271.85 5958.5,5271.85 6112.96,5117.39 6112.96,4816.39 6079.5,4782.93 5352.93,4782.93 5220,4650 4281.12,4650 4234.52,4567.69 4234.52,3764.08 4210.2,3739.76 3935.76,3739.76 3655,4095 3655,5217.64
B_M1 on Bottom Layer (solid, remove dead copper, pour order 1): 4915,5034.98 4935.35,5055.32 4935.35,5094.65 4930,5100 4615,5100 4275.16,4760.16 3867.17,4760.16 3822.01,4715 3820,4715 3820,4640 4305,4640 4625,4960 4915,4960
B_M2 on Bottom Layer (solid, remove dead copper, pour order 2): 4965,5040 5010,5040 5015,5045 5015,5095 5020,5100 4940,5180 4503.61,5180 4174.57,4850.96 3785.96,4850.96 3685,4750 3685,4305 3835,4155 3997.01,4155 3997.01,4236.07 3990,4240 3965,4255 3910,4255 3910,4270 3805,4375 3805,4705 3865,4765 4270,4765 4610,5105 4940,5105 4945,5100 4945,5050 4955,5050
3.3V on 电源层 (split plane): 3910,4302.37 3910,4342.09 3920,4342.09 3920,4302.37
3.3V on 电源层 (split plane): 3920,4302.37 3920,4262.64 3910,4262.64 3910,4302.37
3.3V on 电源层 (split plane): 3915,4307.37 3954.73,4307.37 3954.73,4297.37 3915,4297.37
3.3V on 电源层 (split plane): 3875.28,4307.37 3915,4307.37 3915,4297.37 3875.28,4297.37
3.3V on 电源层 (split plane): 5062.1,3835 5105.77,3835 5105.77,3825 5062.1,3825
3.3V on 电源层 (split plane): 5018.44,3835 5062.1,3835 5062.1,3825 5018.44,3825
3.3V on 电源层 (split plane): 5057.1,3786.34 5057.1,3830 5067.1,3830 5067.1,3786.34
3.3V on 电源层 (split plane): 5067.1,3873.66 5067.1,3830 5057.1,3830 5057.1,3873.66
3.3V on 电源层 (split plane): 5408.47,4608.05 5408.47,4651.71 5418.47,4651.71 5418.47,4608.05
3.3V on 电源层 (split plane): 5369.8,4613.05 5413.47,4613.05 5413.47,4603.05 5369.8,4603.05
3.3V on 电源层 (split plane): 5413.47,4613.05 5457.13,4613.05 5457.13,4603.05 5413.47,4603.05
3.3V on 电源层 (split plane): 5874.36,4617.63 5874.36,4577.91 5864.36,4577.91 5864.36,4617.63
3.3V on 电源层 (split plane): 5864.36,4617.63 5864.36,4657.36 5874.36,4657.36 5874.36,4617.63
3.3V on 电源层 (split plane): 5829.63,4622.63 5869.36,4622.63 5869.36,4612.63 5829.63,4612.63
3.3V on 电源层 (split plane): 5869.36,4622.63 5909.09,4622.63 5909.09,4612.63 5869.36,4612.63
+5V on 电源层 (split plane): 4347.8,5951.65 4389.5,5951.65 4389.5,5941.65 4347.8,5941.65
+5V on 电源层 (split plane): 4306.1,5951.65 4347.8,5951.65 4347.8,5941.65 4306.1,5941.65
+5V on 电源层 (split plane): 4352.8,5946.65 4352.8,5904.96 4342.8,5904.96 4342.8,5946.65
+5V on 电源层 (split plane): 4342.8,5946.65 4342.8,5988.35 4352.8,5988.35 4352.8,5946.65
+5V on 电源层 (split plane): 3894.8,5815 3935,5815 3935,5805 3894.8,5805
+5V on 电源层 (split plane): 3935,5815 3975.2,5815 3975.2,5805 3935,5805
+5V on 电源层 (split plane): 3930,5810 3930,5850.2 3940,5850.2 3940,5810
+5V on 电源层 (split plane): 3940,5810 3940,5769.8 3930,5769.8 3930,5810
+5V on 电源层 (split plane): 4680.35,5643.3 4680.35,5685 4690.35,5685 4690.35,5643.3
+5V on 电源层 (split plane): 4690.35,5726.7 4690.35,5685 4680.35,5685 4680.35,5726.7
+5V on 电源层 (split plane): 4643.65,5690 4685.35,5690 4685.35,5680 4643.65,5680
+5V on 电源层 (split plane): 4685.35,5690 4727.05,5690 4727.05,5680 4685.35,5680
VBAT on 电源层 (split plane): 3749.52,5615 3805,5615 3805,5605 3749.52,5605
VBAT on 电源层 (split plane): 3800,5610 3800,5665.48 3810,5665.48 3810,5610
VBAT on 电源层 (split plane): 3810,5610 3810,5554.52 3800,5554.52 3800,5610
VBAT on 电源层 (split plane): 5295.16,6355 5340.79,6355 5340.79,6345 5295.16,6345
VBAT on 电源层 (split plane): 5340.79,6355 5386.42,6355 5386.42,6345 5340.79,6345
VBAT on 电源层 (split plane): 5335.79,6350 5335.79,6395.63 5345.79,6395.63 5345.79,6350
VBAT on 电源层 (split plane): 5345.79,6350 5345.79,6304.37 5335.79,6304.37 5335.79,6350
VBAT on 电源层 (split plane): 4944.84,6370 5020,6370 5020,6360 4944.84,6360
VBAT on 电源层 (split plane): 5020,6370 5095.16,6370 5095.16,6360 5020,6360
VBAT on 电源层 (split plane): 5015,6365 5015,6440.16 5025,6440.16 5025,6365
VBAT on 电源层 (split plane): 5025,6365 5025,6289.84 5015,6289.84 5015,6365

## Keep-outs
Board Outline Layer:
  lines w10 net "": 3625,3710 6160,3710 6160,6465 3625,6465 3625,3710

## Other copper
Top Layer:
  drawing of 152 lines, arcs and shapes, not listed
Inner1:
  region net $1N58022: 4375,4995 4445,5065 4595,5065 4605,5055 4605,5008.84 4575.47,4979.31 4464.31,4979.31 4390,4905 4230,4905 4175,4960 3830,4960 3785,4915 3715,4915 3710,4920 3710,4995
  region net $1N58022: 4490,5015 4515,4990 4583.61,4990 4700,5106.39 4700,5120 5725,5120 5970,4875 6065,4875 6085,4895 6085,4975 6080,4980 5980,4980 5780,5180 4575,5180 4490,5095
  region net SPI1_CS: 4597.85,3858.68 4590.78,3865.75 4589.31,3864.37 4588.36,3863.59 4587.45,3862.91 4586.55,3862.33 4585.68,3861.84 4584.83,3861.44 4583.99,3861.12 4583.16,3860.87 4582.34,3860.7 4581.53,3860.59 4580.73,3860.54 4579.92,3860.55 4579.11,3860.6 4577.88,3860.75 4576.21,3861.08 4570.72,3862.43 4568.11,3862.96 4565.84,3863.27 4564.01,3863.42 4562.07,3863.47 4560.01,3863.4 4595.5,3827.9 4595.57,3829.97 4595.52,3831.91 4595.38,3833.74 4595.06,3836.01 4594.54,3838.62 4593.18,3844.11 4592.86,3845.78 4592.7,3847.01 4592.65,3847.82 4592.64,3848.62 4592.69,3849.43 4592.8,3850.24 4592.97,3851.06 4593.22,3851.89 4593.54,3852.73 4593.94,3853.58 4594.43,3854.45 4595.01,3855.34 4595.69,3856.26 4596.47,3857.21
  region net SPI1_DC: 4696.8,3859.73 4689.73,3866.8 4688.36,3865.52 4687.47,3864.78 4686.6,3864.13 4685.75,3863.56 4684.91,3863.08 4684.09,3862.68 4683.27,3862.34 4682.46,3862.07 4681.66,3861.86 4680.86,3861.71 4680.06,3861.62 4679.26,3861.57 4678.05,3861.57 4676.82,3861.66 4674.71,3861.94 4668.67,3862.98 4666.03,3863.3 4663.75,3863.45 4661.3,3863.46 4660.01,3863.4 4695.5,3827.9 4695.54,3829.54 4695.4,3832.35 4694.27,3843.54 4694,3848.16 4694,3850.37 4694.12,3852.47 4694.39,3854.43 4694.58,3855.35 4694.82,3856.22 4695.11,3857.04 4695.45,3857.81 4695.84,3858.51 4696.29,3859.16
  region net SPI1_RES: 4812.23,3844.3 4805.16,3851.37 4804.65,3850.89 4804.12,3850.46 4803.59,3850.08 4803.04,3849.74 4802.48,3849.45 4801.91,3849.2 4801.33,3848.99 4800.74,3848.83 4800.14,3848.7 4799.53,3848.62 4798.92,3848.57 4798.29,3848.55 4797.65,3848.57 4796.35,3848.71 4795.02,3848.97 4793.66,3849.34 4792.27,3849.81 4790.15,3850.68 4787.23,3852.09 4777.38,3857.6 4772.75,3860.04 4769.68,3861.42 4767.39,3862.26 4765.88,3862.71 4764.39,3863.06 4762.91,3863.3 4761.45,3863.42 4760.01,3863.4 4795.5,3827.9 4795.57,3828.46 4795.7,3829.02 4795.9,3829.57 4796.15,3830.13 4796.46,3830.69 4796.82,3831.25 4797.23,3831.81 4798.17,3832.93 4799.26,3834.04 4801.11,3835.68 4804.5,3838.32 4810.33,3842.64 4811.82,3843.9
  region net SPI1_MOSI: 4891.37,3865.16 4884.3,3872.23 4883.16,3871.17 4881.92,3870.2 4880.6,3869.29 4879.2,3868.46 4877.74,3867.7 4875.45,3866.68 4873.06,3865.82 4870.6,3865.09 4868.12,3864.5 4864.81,3863.91 4861.57,3863.52 4860.01,3863.4 4895.5,3827.9 4895.53,3828.96 4895.48,3830.06 4895.29,3831.77 4894.98,3833.55 4894.4,3836.02 4892.65,3841.82 4890.2,3849.68 4889.43,3852.85 4889.09,3854.68 4888.88,3856.45 4888.82,3857.59 4888.82,3858.7 4888.91,3859.76 4889.08,3860.79 4889.33,3861.77 4889.5,3862.24 4889.69,3862.7 4889.9,3863.14 4890.14,3863.57 4890.41,3863.99 4890.7,3864.4 4891.02,3864.79
  region net ENCODER1_A: 5848.68,4448.54 5841.61,4441.46 5842,4441.02 5842.34,4440.53 5842.61,4440 5842.83,4439.45 5843,4438.86 5843.12,4438.24 5843.19,4437.59 5843.22,4436.92 5843.16,4435.51 5842.97,4434.03 5842.51,4431.7 5840.83,4425.32 5840.29,4423.02 5840.04,4421.57 5839.89,4420.2 5839.87,4419.55 5839.89,4418.93 5871.21,4450.25 5870.59,4450.27 5869.94,4450.25 5868.57,4450.11 5867.12,4449.85 5864.04,4449.11 5858.44,4447.64 5856.12,4447.17 5854.63,4446.98 5853.22,4446.93 5852.55,4446.96 5851.91,4447.03 5851.29,4447.14 5850.7,4447.31 5850.14,4447.53 5849.62,4447.8 5849.13,4448.14
  region net ENCODER1_B: 5829.16,4508.01 5829.16,4498.01 5830.93,4498.07 5832.56,4498.23 5834.08,4498.48 5836.82,4499.1 5839.84,4499.85 5840.98,4500.07 5842.09,4500.19 5842.64,4500.21 5843.2,4500.2 5843.75,4500.16 5844.31,4500.07 5844.88,4499.95 5845.45,4499.78 5846.03,4499.56 5846.63,4499.29 5847.23,4498.97 5847.85,4498.59 5848.49,4498.15 5849.83,4497.07 5849.83,4541.36 5848.97,4540.53 5848.18,4539.61 5847.44,4538.61 5846.74,4537.53 5846.1,4536.39 5845.2,4534.56 5844.13,4531.97 5842.23,4526.44 5839.75,4518.88 5838.75,4516.36 5837.93,4514.61 5837.34,4513.53 5836.71,4512.52 5836.04,4511.59 5835.32,4510.75 5834.94,4510.37 5834.55,4510.01 5834.14,4509.68 5833.72,4509.38 5833.28,4509.1 5832.83,4508.85 5832.36,4508.63 5831.87,4508.45 5831.37,4508.29 5830.84,4508.17 5830.3,4508.08 5829.74,4508.03
  region net XI: 4406.35,4219.98 4406.35,4229.98 4405.78,4230 4405.21,4230.07 4404.64,4230.18 4404.08,4230.32 4403.51,4230.5 4402.41,4230.96 4401.33,4231.52 4400.29,4232.17 4399.3,4232.87 4397.94,4233.98 4397.94,4215.97 4399.3,4217.08 4400.29,4217.79 4401.33,4218.43 4402.41,4218.99 4403.51,4219.45 4404.08,4219.63 4404.64,4219.78 4405.21,4219.89 4405.78,4219.95
  region net SAO: 4860,4226.35 4850,4226.35 4849.98,4225.78 4849.91,4225.21 4849.8,4224.64 4849.66,4224.08 4849.47,4223.51 4849.02,4222.41 4848.46,4221.33 4847.81,4220.29 4847.11,4219.3 4845.99,4217.94 4864.01,4217.94 4862.89,4219.3 4862.19,4220.29 4861.54,4221.33 4860.98,4222.41 4860.53,4223.51 4860.34,4224.08 4860.2,4224.64 4860.09,4225.21 4860.02,4225.78
  region net D+: 5454.48,4137.6 5447.4,4130.52 5447.92,4130.04 5448.43,4129.62 5449.42,4128.92 5450.76,4128.08 5451.16,4127.82 5451.53,4127.53 5451.87,4127.23 5452.17,4126.88 5452.43,4126.49 5452.64,4126.05 5452.82,4125.53 5452.94,4124.94 5453.02,4124.25 5465.75,4136.98 5465.18,4137 5463.83,4136.93 5459.8,4136.6 5458.18,4136.56 5457.41,4136.6 5456.69,4136.67 5456.02,4136.81 5455.42,4137 5454.9,4137.26
  region net D+: 5418.02,4159.9 5425.1,4166.98 5424.71,4167.39 5424.35,4167.84 5424.03,4168.32 5423.73,4168.83 5423.46,4169.35 5423,4170.46 5422.64,4171.62 5422.36,4172.81 5422.16,4174 5421.98,4175.75 5409.25,4163.02 5411,4162.84 5412.19,4162.64 5413.38,4162.36 5414.54,4162 5415.65,4161.54 5416.17,4161.27 5416.68,4160.97 5417.16,4160.65 5417.61,4160.29
  region net ENCODER1_A: 5043.02,4449.9 5050.1,4456.98 5049.71,4457.39 5049.35,4457.84 5049.03,4458.32 5048.73,4458.83 5048.46,4459.35 5048,4460.46 5047.64,4461.62 5047.36,4462.81 5047.16,4464 5046.98,4465.75 5034.25,4453.02 5036,4452.84 5037.19,4452.64 5038.38,4452.36 5039.54,4452 5040.65,4451.54 5041.17,4451.27 5041.68,4450.97 5042.16,4450.65 5042.61,4450.29
  region net XI: 4794.9,4251.98 4801.98,4244.9 4802.39,4245.29 4802.84,4245.65 4803.32,4245.97 4803.83,4246.27 4804.35,4246.54 4805.46,4247 4806.62,4247.36 4807.81,4247.64 4809,4247.84 4810.75,4248.02 4798.02,4260.75 4797.84,4259 4797.64,4257.81 4797.36,4256.62 4797,4255.46 4796.54,4254.35 4796.27,4253.83 4795.97,4253.32 4795.65,4252.84 4795.29,4252.39
  region net ENCODER1_B: 5023.02,4509.9 5030.1,4516.98 5029.71,4517.39 5029.35,4517.84 5029.03,4518.32 5028.73,4518.83 5028.46,4519.35 5028,4520.46 5027.64,4521.62 5027.36,4522.81 5027.16,4524 5026.98,4525.75 5014.25,4513.02 5016,4512.84 5017.19,4512.64 5018.38,4512.36 5019.54,4512 5020.65,4511.54 5021.17,4511.27 5021.68,4510.97 5022.16,4510.65 5022.61,4510.29
  region net BIN2: 4971.98,4380.1 4964.9,4373.02 4965.29,4372.61 4965.65,4372.16 4965.97,4371.68 4966.27,4371.17 4966.54,4370.65 4967,4369.54 4967.36,4368.38 4967.64,4367.19 4967.84,4366 4968.02,4364.25 4980.75,4376.98 4979,4377.16 4977.81,4377.36 4976.62,4377.64 4975.46,4378 4974.35,4378.46 4973.83,4378.73 4973.32,4379.03 4972.84,4379.35 4972.39,4379.71
  region net SPI1_CS: 4978.65,4090 4978.65,4080 4979.22,4079.98 4979.79,4079.91 4980.36,4079.8 4980.92,4079.66 4981.49,4079.47 4982.59,4079.02 4983.67,4078.46 4984.71,4077.81 4985.7,4077.11 4987.06,4075.99 4987.06,4094.01 4985.7,4092.89 4984.71,4092.19 4983.67,4091.54 4982.59,4090.98 4981.49,4090.53 4980.92,4090.34 4980.36,4090.2 4979.79,4090.09 4979.22,4090.02
  region net SPI1_DC: 4960,4032.54 4970,4032.54 4970.13,4033.12 4970.49,4033.72 4971,4034.33 4971.63,4034.94 4973.55,4036.6 4974.01,4037.06 4955.99,4037.06 4956.45,4036.6 4958.37,4034.94 4959,4034.33 4959.51,4033.72 4959.87,4033.12
  region net SAO: 4769.02,4572.96 4776.09,4580.03 4775.71,4580.45 4775.35,4580.9 4775.03,4581.38 4774.73,4581.88 4774.46,4582.41 4774,4583.51 4773.64,4584.67 4773.36,4585.86 4773.16,4587.06 4772.98,4588.81 4760.25,4576.07 4762,4575.9 4763.19,4575.7 4764.38,4575.42 4765.54,4575.05 4766.65,4574.59 4767.17,4574.32 4767.68,4574.03 4768.16,4573.7 4768.6,4573.35
  region net BIN1: 4984.9,4641.98 4991.98,4634.9 4992.39,4635.29 4992.84,4635.65 4993.32,4635.97 4993.83,4636.27 4994.35,4636.54 4995.46,4637 4996.62,4637.36 4997.81,4637.64 4999,4637.84 5000.75,4638.02 4988.02,4650.75 4987.84,4649 4987.64,4647.81 4987.36,4646.62 4987,4645.46 4986.54,4644.35 4986.27,4643.83 4985.97,4643.32 4985.65,4642.84 4985.29,4642.39
  region net BIN1: 5036.98,4355.1 5029.9,4348.02 5030.29,4347.61 5030.65,4347.16 5030.97,4346.68 5031.27,4346.17 5031.54,4345.65 5032,4344.54 5032.36,4343.38 5032.64,4342.19 5032.84,4341 5033.02,4339.25 5045.75,4351.98 5044,4352.16 5042.81,4352.36 5041.62,4352.64 5040.46,4353 5039.35,4353.46 5038.83,4353.73 5038.32,4354.03 5037.84,4354.35 5037.39,4354.71
  region net SPI1_RES: 4922.83,3969.05 4929.9,3961.98 4930.58,3962.59 4931.22,3963.07 4931.83,3963.42 4932.43,3963.66 4933.01,3963.79 4933.59,3963.85 4934.17,3963.83 4934.76,3963.76 4936.66,3963.38 4938.13,3963.12 4938.94,3963.03 4939.81,3962.99 4940.75,3963.02 4928.02,3975.75 4927.95,3975.11 4927.83,3974.54 4927.67,3974.02 4927.47,3973.55 4927.23,3973.12 4926.95,3972.72 4926.63,3972.36 4926.29,3972.01 4925.53,3971.34 4923.78,3969.92
  region net SPI1_MOSI: 4910,3895.86 4920,3895.86 4920.02,3896.4 4920.09,3896.9 4920.2,3897.36 4920.34,3897.78 4920.53,3898.18 4920.74,3898.55 4920.98,3898.9 4921.25,3899.24 4921.86,3899.9 4923.63,3901.65 4924.01,3902.06 4905.99,3902.06 4906.74,3901.26 4908.46,3899.57 4908.75,3899.24 4909.02,3898.9 4909.26,3898.55 4909.47,3898.18 4909.66,3897.78 4909.8,3897.36 4909.91,3896.9 4909.98,3896.4
Bottom Layer:
  region net SW: 3985,3845 3985,3847.5 3997.49,3859.99 3999.99,3859.99
  region net GROUND: 6040,5893.36 6050,5893.36 6050.06,5895.33 6050.24,5897.2 6050.54,5898.98 6050.94,5900.69 6051.44,5902.32 6052.04,5903.88 6052.73,5905.39 6053.5,5906.85 6054.35,5908.27 6055.59,5910.1 6057.31,5912.33 6059.96,5915.39 6068.51,5924.55 6068.96,5925.05 6001.04,5925.05 6002.01,5924.03 6003.09,5923.04 6004.87,5921.59 6006.85,5920.2 6009.72,5918.39 6019.29,5913.19 6027.3,5908.8 6030.24,5906.95 6032.28,5905.5 6034.15,5904.01 6035.28,5902.97 6036.32,5901.91 6037.24,5900.81 6038.05,5899.67 6038.73,5898.5 6039.02,5897.89 6039.27,5897.28 6039.49,5896.66 6039.67,5896.02 6039.81,5895.37 6039.92,5894.72 6039.98,5894.04
  region net GROUND: 3741.93,5888.36 3751.93,5888.36 3751.95,5888.87 3751.99,5889.39 3752.07,5889.91 3752.18,5890.43 3752.48,5891.48 3752.88,5892.53 3753.39,5893.58 3753.98,5894.65 3754.67,5895.71 3755.85,5897.31 3757.19,5898.91 3759.19,5901.03 3762.52,5904.19 3772.73,5912.71 3778.04,5917.21 3779.78,5918.87 3780.89,5920.05 3712.98,5920.05 3714.09,5918.87 3716.3,5916.78 3725.93,5908.8 3731.92,5903.67 3734.68,5901.03 3736.67,5898.91 3738.01,5897.31 3739.19,5895.71 3739.88,5894.65 3740.48,5893.58 3740.99,5892.53 3741.39,5891.48 3741.69,5890.43 3741.79,5889.91 3741.87,5889.39 3741.92,5888.87
  region net ENCODER2_A: 3955.2,4494.22 3955.2,4504.22 3953.48,4504.27 3952.43,4504.37 3951.45,4504.51 3950.55,4504.7 3949.71,4504.93 3948.93,4505.21 3948.21,4505.52 3947.54,4505.87 3946.92,4506.26 3946.34,4506.68 3945.79,4507.14 3945.28,4507.63 3944.79,4508.15 3944.1,4508.99 3943.22,4510.19 3940.55,4514.32 3939.23,4516.21 3938.01,4517.77 3936.61,4519.36 3935.41,4520.56 3934.53,4521.36 3934.53,4477.07 3935.83,4478.28 3936.98,4479.48 3938.33,4481.06 3939.51,4482.61 3941.48,4485.56 3943.44,4488.55 3944.1,4489.45 3944.79,4490.28 3945.28,4490.8 3945.79,4491.29 3946.34,4491.75 3946.92,4492.17 3947.54,4492.56 3948.21,4492.91 3948.93,4493.23 3949.71,4493.5 3950.55,4493.73 3951.45,4493.92 3952.43,4494.06 3953.48,4494.16
  region net ENCODER2_B: 3955.2,4395.79 3955.2,4405.79 3953.48,4405.84 3952.43,4405.94 3951.45,4406.08 3950.55,4406.27 3949.71,4406.5 3948.93,4406.78 3948.21,4407.09 3947.54,4407.44 3946.92,4407.83 3946.34,4408.25 3945.79,4408.71 3945.28,4409.2 3944.79,4409.72 3944.1,4410.56 3943.22,4411.76 3940.55,4415.89 3939.23,4417.78 3938.01,4419.34 3936.61,4420.93 3935.41,4422.13 3934.53,4422.93 3934.53,4378.64 3935.83,4379.85 3936.98,4381.05 3938.33,4382.63 3939.51,4384.18 3941.48,4387.13 3943.44,4390.12 3944.1,4391.02 3944.79,4391.85 3945.28,4392.37 3945.79,4392.86 3946.34,4393.32 3946.92,4393.74 3947.54,4394.13 3948.21,4394.48 3948.93,4394.8 3949.71,4395.07 3950.55,4395.3 3951.45,4395.49 3952.43,4395.63 3953.48,4395.73
  region net AIN1: 5300.1,4313.02 5293.02,4320.1 5292.61,4319.71 5292.16,4319.35 5291.68,4319.03 5291.17,4318.73 5290.65,4318.46 5289.54,4318 5288.38,4317.64 5287.19,4317.36 5286,4317.16 5284.25,4316.98 5296.98,4304.25 5297.16,4306 5297.36,4307.19 5297.64,4308.38 5298,4309.54 5298.46,4310.65 5298.73,4311.17 5299.03,4311.68 5299.35,4312.16 5299.71,4312.61
  region net ENCODER2_A: 5079.9,4471.98 5086.98,4464.9 5087.39,4465.29 5087.84,4465.65 5088.32,4465.97 5088.83,4466.27 5089.35,4466.54 5090.46,4467 5091.62,4467.36 5092.81,4467.64 5094,4467.84 5095.75,4468.02 5083.02,4480.75 5082.84,4479 5082.64,4477.81 5082.36,4476.62 5082,4475.46 5081.54,4474.35 5081.27,4473.83 5080.97,4473.32 5080.65,4472.84 5080.29,4472.39
  region net AIN1: 5300,4648.65 5310,4648.65 5310.02,4649.22 5310.09,4649.79 5310.2,4650.36 5310.34,4650.92 5310.53,4651.49 5310.98,4652.59 5311.54,4653.67 5312.19,4654.71 5312.89,4655.7 5314.01,4657.06 5295.99,4657.06 5297.11,4655.7 5297.81,4654.71 5298.46,4653.67 5299.02,4652.59 5299.47,4651.49 5299.66,4650.92 5299.8,4650.36 5299.91,4649.79 5299.98,4649.22
  region net ENCODER2_B: 5049.9,4406.98 5056.98,4399.9 5057.39,4400.29 5057.84,4400.65 5058.32,4400.97 5058.83,4401.27 5059.35,4401.54 5060.46,4402 5061.62,4402.36 5062.81,4402.64 5064,4402.84 5065.75,4403.02 5053.02,4415.75 5052.84,4414 5052.64,4412.81 5052.36,4411.62 5052,4410.46 5051.54,4409.35 5051.27,4408.83 5050.97,4408.32 5050.65,4407.84 5050.29,4407.39
  region net AIN2: 5270,4658.65 5280,4658.65 5280.02,4659.22 5280.09,4659.79 5280.2,4660.36 5280.34,4660.92 5280.53,4661.49 5280.98,4662.59 5281.54,4663.67 5282.19,4664.71 5282.89,4665.7 5284.01,4667.06 5265.99,4667.06 5267.11,4665.7 5267.81,4664.71 5268.46,4663.67 5269.02,4662.59 5269.47,4661.49 5269.66,4660.92 5269.8,4660.36 5269.91,4659.79 5269.98,4659.22
  region net AIN2: 5280,4356.35 5270,4356.35 5269.98,4355.78 5269.91,4355.21 5269.8,4354.64 5269.66,4354.08 5269.47,4353.51 5269.02,4352.41 5268.46,4351.33 5267.81,4350.29 5267.11,4349.3 5265.99,4347.94 5284.01,4347.94 5282.89,4349.3 5282.19,4350.29 5281.54,4351.33 5280.98,4352.41 5280.53,4353.51 5280.34,4354.08 5280.2,4354.64 5280.09,4355.21 5280.02,4355.78
  region net GROUND: 4945,4481.35 4935,4481.35 4934.98,4480.78 4934.91,4480.21 4934.8,4479.64 4934.66,4479.08 4934.47,4478.51 4934.02,4477.41 4933.46,4476.33 4932.81,4475.29 4932.11,4474.3 4930.99,4472.94 4949.01,4472.94 4947.89,4474.3 4947.19,4475.29 4946.54,4476.33 4945.98,4477.41 4945.53,4478.51 4945.34,4479.08 4945.2,4479.64 4945.09,4480.21 4945.02,4480.78
  region net GROUND: 4948.54,4810.61 4948.02,4810.14 4947.45,4809.72 4946.86,4809.38 4946.29,4809.16 4945.78,4809.07 4945.37,4809.16 4945.1,4809.46 4945,4810 4945,4780 4945.06,4781.44 4945.24,4782.95 4945.52,4784.5 4945.91,4786.1 4946.66,4788.53 4947.6,4790.97 4948.7,4793.39 4949.92,4795.74 4951.25,4797.97 4952.66,4800.04 4954.12,4801.91 4955.11,4803.02 4955.61,4803.54
电源层 (plane layer: these items are gaps in the copper):
  lines w10 net "": 3480,5520 3865,5520 3875,5530 3869.48,5535.52 3869.48,5854.48 4053.02,6038.02 5085.91,6038.02 5197.89,6150 5390,6150 5515,6025 5515,5515 5715,5315 6190,5315 ; 3879.75,5547.78 3879.75,5864.75 4040,6025 4820,6025 4820,5754.12 4705,5639.12 4705,5250 4685,5230 4505,5230 4455.01,5180.01 4146.86,5180.01 4110,5216.87 4110,5317.53 3879.75,5547.78

## Silkscreen, mask and mechanical layers (free items; w line width, h text height)
Top Silkscreen Layer:
  text "+" at 5125,6326.36 h78.45
  text "-" at 3825,6121.36 h78.45
  text "+5v" at 3828.69,5805.24 h15.33
  text "SKIPER CONTROL" at 5040.73,5251.64 h77.88
  text "GND" at 5477.77,4893.91 h26.06
  text "SWCLK" at 5475.49,4788.91 h26.06
  text "SWDIO" at 5475.49,4698.91 h26.06
  text "3.3V" at 5476.63,4593.91 h26.06
Mechanical Layer:
  circle w1 net "": c6034.5,3840 r78.74
  circle w1 net "": c3760.5,3830 r78.74
  circle w1 net "": c3760.5,6340 r78.74
  circle w1 net "": c6034.5,6320 r78.74